# Altium PCB MRv2.PcbDoc
Units mm, origin at the board's own origin, x right, y up, seen from the top; angles counter-clockwise.
Board outline 58.67 x 73.25 mm, 2 copper layers (Top Layer, Bottom Layer); 27 components, 29 nets, 132 pads, 15 vias.
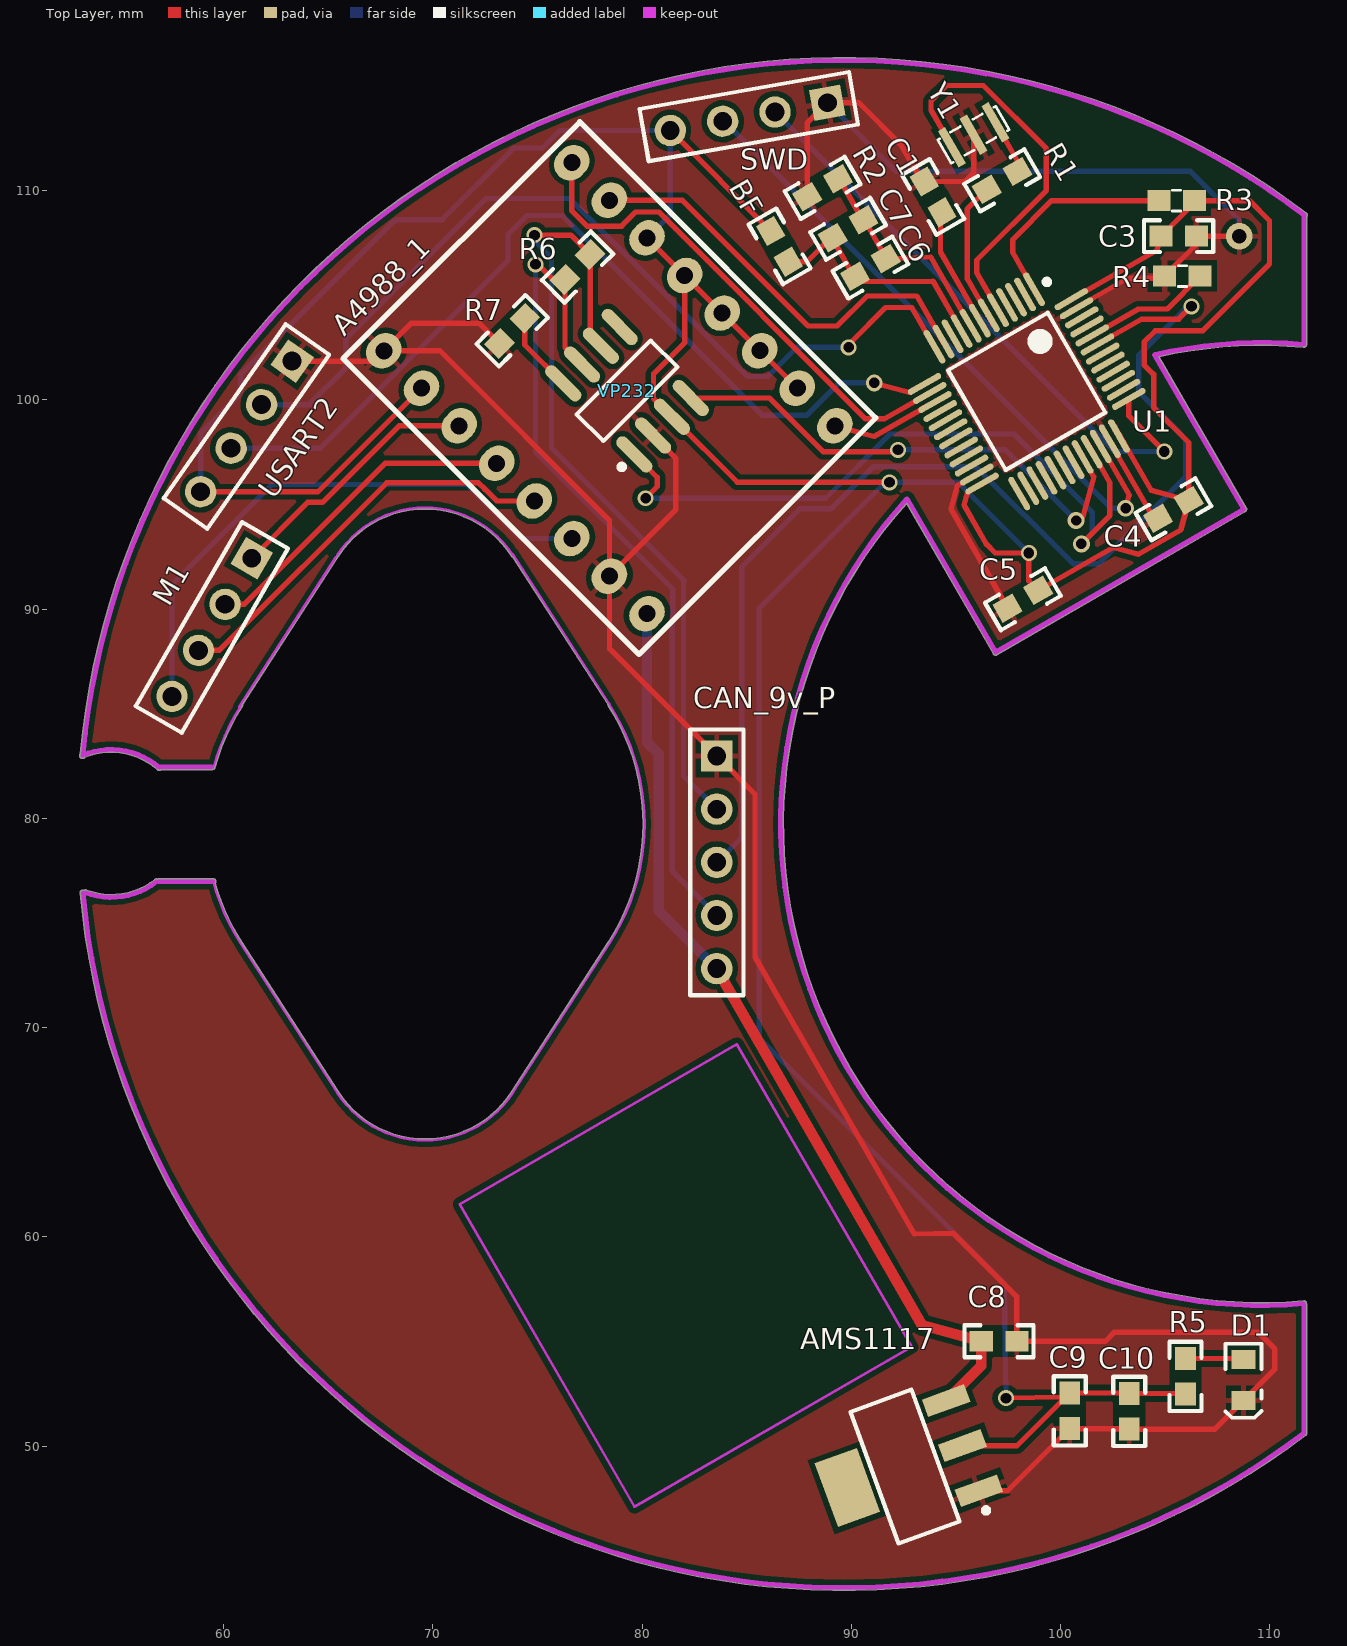
[diagram p0: Top Layer view]
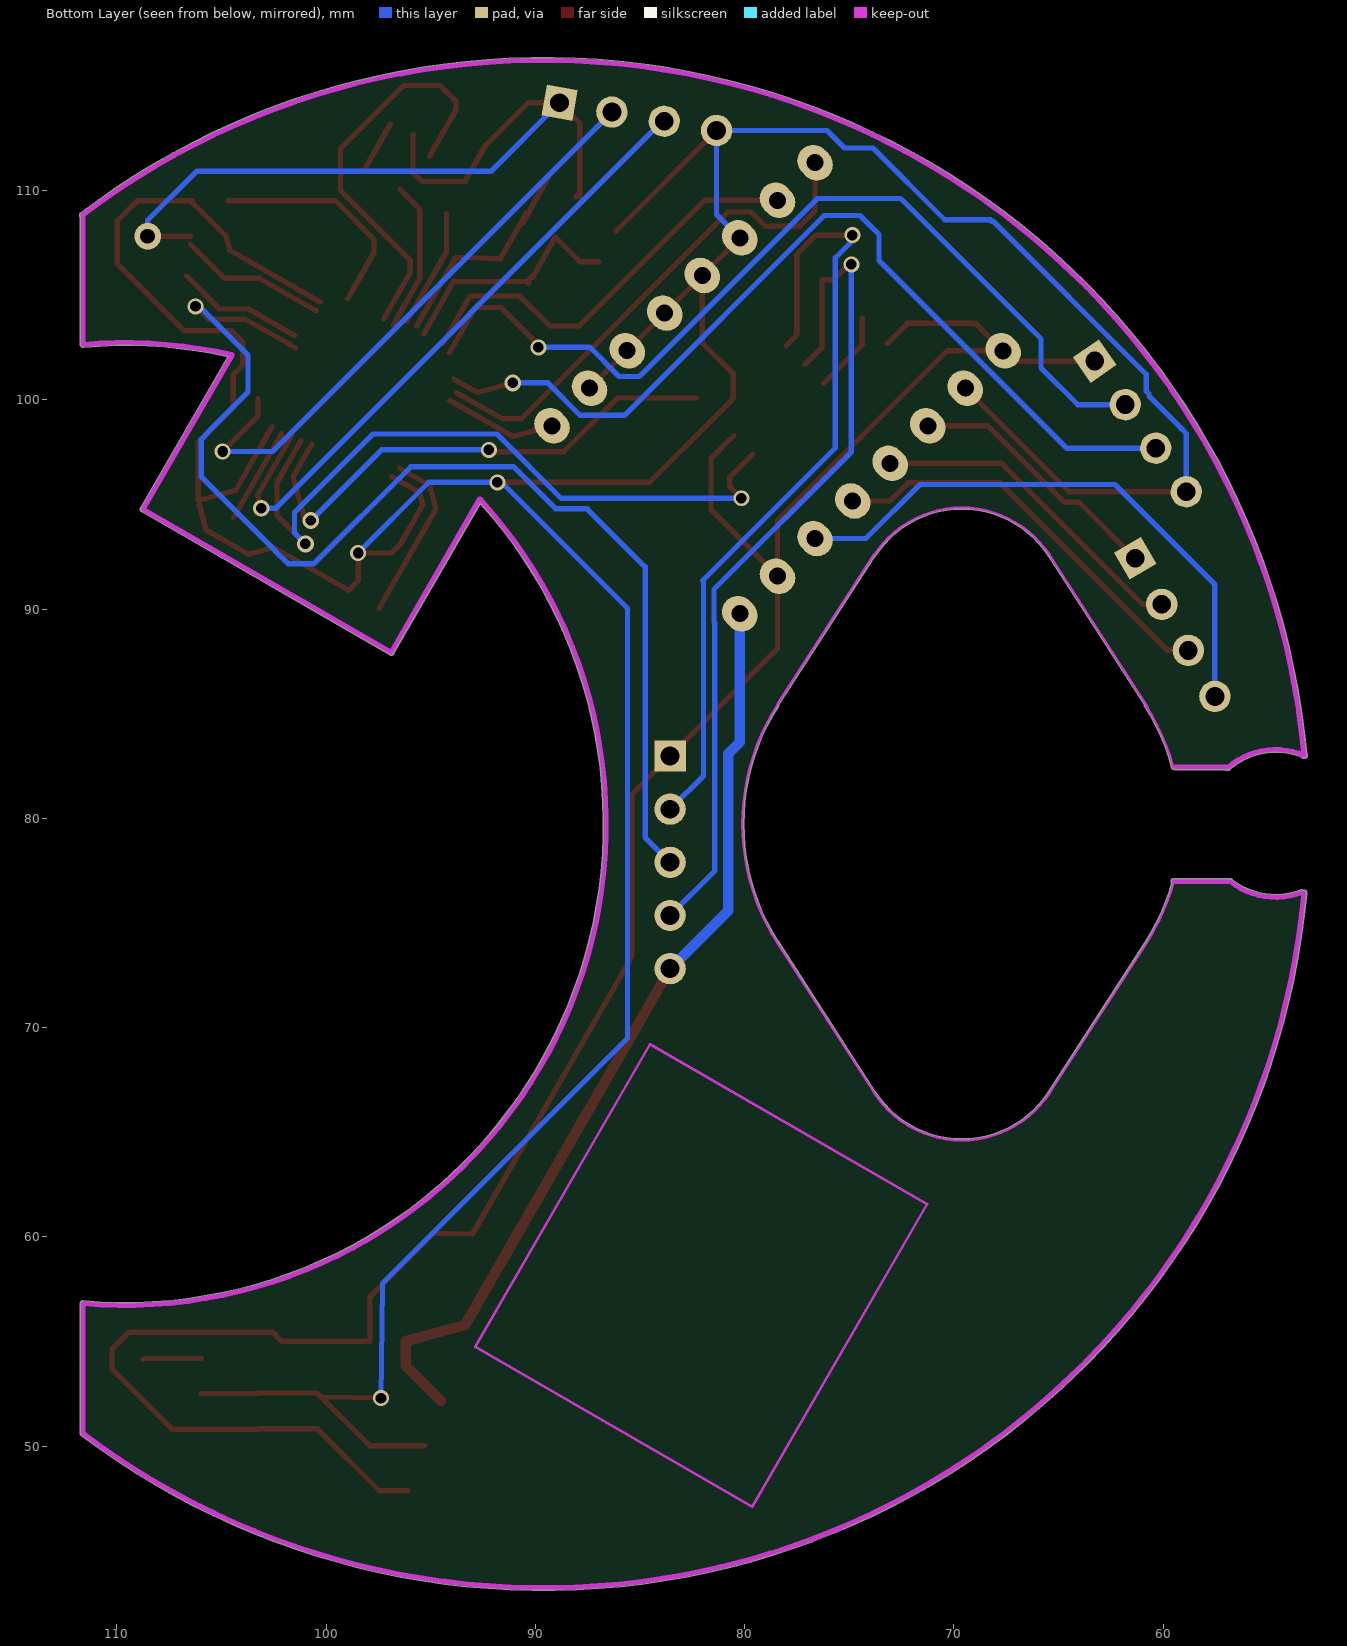
[diagram p1: Bottom Layer view, seen from below]

## Layer stack, top to bottom
Top Solder: solder mask 0.0102, Solder Resist, Dk 3.5
Top Layer: signal copper 0.0356
Dielectric1: dielectric 0.32, FR-4, Dk 4.8
Bottom Layer: signal copper 0.0356
Bottom Solder: solder mask 0.0102, Solder Resist, Dk 3.5

## Board outline
53.144,76.434 cw(c53.271,76.446) 53.322,76.563 cw(c53.392,76.457) 53.437,76.576 ccw(c54.623,79.733) 56.711,77.084 cw(c56.79,76.984) 56.853,77.095 cw(c56.921,76.987) 56.921,77.115 59.495,77.115 cw(c59.495,76.987) 59.623,76.987 cw(c59.495,76.987) 59.593,76.905 ccw(c69.623,79.733) 60.867,74.082 65.476,66.941 ccw(c65.422,66.906) 65.476,66.941 ccw(c69.623,69.618) 65.476,66.941 ccw(c69.623,69.618) 73.77,66.941 ccw(c69.623,69.618) 73.77,66.941 78.379,74.082 ccw(c69.623,79.733) 80.044,79.733 ccw(c69.623,79.733) 78.379,85.384 cw(c78.433,85.418) 78.371,85.435 cw(c78.419,85.478) 78.365,85.443 73.813,92.496 cw(c73.824,92.559) 73.77,92.525 ccw(c69.623,89.848) 65.476,92.525 cw(c65.422,92.559) 65.416,92.496 cw(c65.359,92.466) 65.423,92.466 cw(c65.359,92.466) 65.413,92.431 60.893,85.427 cw(c60.839,85.393) 60.903,85.393 cw(c60.839,85.393) 60.892,85.358 ccw(c69.648,79.707) 59.582,82.405 cw(c59.521,82.421) 59.502,82.36 cw(c59.411,82.448) 59.411,82.321 56.999,82.321 cw(c56.922,82.423) 56.839,82.327 ccw(c54.623,79.784) 53.364,82.913 cw(c53.269,82.998) 53.245,82.873 cw(c53.243,83) 53.149,83.087 cw(c89.623,79.733) 111.733,108.934 cw(c111.656,108.832) 111.784,108.832 cw(c111.656,108.832) 111.75,108.746 111.75,102.647 cw(c111.623,102.647) 111.617,102.52 cw(c111.61,102.647) 111.599,102.52 ccw(c109.623,79.733) 104.694,102.068 108.803,94.95 cw(c108.693,94.886) 108.82,94.886 cw(c108.693,94.886) 108.82,94.886 cw(c108.757,94.776) 108.884,94.776 cw(c108.757,94.776) 108.82,94.665 96.96,87.818 ccw(c96.897,87.928) 96.96,87.818 96.955,87.815 cw(c96.892,87.925) 96.768,87.896 92.638,95.051 ccw(c109.623,79.733) 111.607,56.947 cw(c111.618,56.82) 111.746,56.82 cw(c111.618,56.82) 111.745,56.806 cw(c111.623,56.769) 111.75,56.769 111.75,50.654 cw(c111.63,50.613) 111.757,50.613 cw(c111.63,50.613) 111.707,50.512 cw(c89.623,79.733)

## Design rules (kind name [scope] priority, off if disabled: settings)
Clearance [All] p1: gap=0.254
PolygonConnect [All] p1: connectstyle=Relief reliefconductorwidth=0.254 reliefentries=4 polygonreliefangle="90 Angle" airgapwidth=0.254
RoutingVias [All] p1: holewidth=0.711 width=1.27 viastyle="Through Hole" minholewidth=0.711 minwidth=1.27 maxholewidth=0.711 maxwidth=1.27
SolderMaskExpansion [All] p1: expansion=0.102
Width [All] p1: maxlimit=0.254 minlimit=0.254 preferedwidth=0.254
30 further rules are at their usual default settings.

## Components (designator, comment, footprint, x,y, rotation, side; value= is the part's Value field where it differs from the comment)
A4988_1 "stepstrick_driver" A4988 78.435,100.559 r45 top
AMS1117 "ASM1117" SOT223 92.558,49.022 r200 top
BF "BF" R1608[0603] 86.563,107.34 r120 top
C1 "cap smd" C1608[0603]N 93.904,109.703 r300 top
C3 "cap smd" C1608[0603]N 105.639,107.823 r0 top
C4 "cap smd" C1608[0603]N 105.385,94.767 r210 top
C5 "cap smd" C1608[0603]N 98.196,90.475 r210 top
C6 "cap smd" C1608[0603]N 90.907,106.324 r30 top
C7 "cap smd" C1608[0603]N 89.84,108.179 r30 top
C8 "cap smd" C1608[0603]N 97.053,55.016 r0 top
C9 "cap smd" C1608[0603]N 100.432,51.689 r270 top
C10 "cap smd" C1608[0603]N 103.276,51.664 r270 top
CAN_9v_P "H_P" HDR1X5 83.566,82.982 r270 top
D1 "LED" D1608[0603] 108.737,53.162 r270 top
M1 "Motor1" HDR1X4 61.341,92.431 r240 top
R1 "RES1" R1608[0603] 97.206,110.49 r210 top
R2 "RES1" R1608[0603] 88.621,110.134 r210 top
R3 "RES1" 1608[0603] 105.537,109.525 r180 top
R4 "RES1" 1608[0603] 105.816,105.918 r0 top
R5 "RES1" R1608[0603] 105.969,53.34 r270 top
R6 "RES1" R1608[0603] 76.911,106.35 r225 top
R7 "RES1" R1608[0603] 73.787,103.302 r225 top
SWD "Header 4" HDR1X4 88.849,114.198 r190 top
U1 "STM32F103C8T6" LQFP48_N 98.374,100.406 r300 top
USART2 "Header 4" HDR1X4 63.271,101.854 r235 top
VP232 "VP230" VP232 79.273,100.432 r135 top
Y1 "CRYSTAL_8M" Crystal_C 95.834,112.674 r30 top

## Footprints (in the part's own frame and the unit in brackets; to place one, negate y for a bottom-side part, rotate by r counter-clockwise, add the part's x,y. Pads: shape width x height; smd on the part's side, far side on the other; paste and mask are expansions set on the pad)
1608[0603] [mm] "Chip Capacitor; Body 1.6 x 0.8 mm (LxW typ)"
  rect 1.1x1 smd: 1(-0.85,0) 2(0.85,0)
  silkscreen extent -0.2,-0.5 0.2,0.5
A4988 [mil]
  oval 70x60 hole 32: 1(-250.39,350) 2(-250,250) 3(-250,150) 4(-250,50) 5(-250,-50) 6(-250,-150) 7(-250,-250) 8(-250,-350) 9(250,350) 10(250,250) 11(250,150) 12(250,50) 13(250,-50) 14(250,-150) 15(250,-250) 16(250,-350)
  silkscreen extent -315,-394 315,394
C1608[0603]N [mm] "Chip Capacitor; Body 1.6 x 0.8 mm (LxW typ)"
  rect 1.1x1 smd: 1(-0.85,0) 2(0.85,0)
  silkscreen extent -1.65,-0.76 1.65,0.76, body extent -0.8,-0.4 0.8,0.4, height 0.8
Crystal_C [mm] "含电容晶振，村田 3.2X1.3mm"
  rect 0.4x2 smd: 1(-1.2,0) 2(0,0) 3(1.2,0)
  silkscreen extent -1.6,-0.65 1.6,0.65
D1608[0603] [mm]
  rect 0.9x1.15 smd: 1(-0.98,0) 2(0.98,0)
  silkscreen extent -1.73,-0.86 1.8,0.86, body extent -0.8,-0.4 0.8,0.4, height 0.8
HDR1X4 [mm] "Connector; Header; 4 Position"
  rect 1.5x1.5 hole 0.9: 1(0,0)
  round 1.5 hole 0.9: 2(2.54,0) 3(5.08,0) 4(7.62,0)
  silkscreen extent -1.27,-1.27 8.89,1.27
HDR1X5 [mm] "Connector; Header; 5 Position"
  rect 1.5x1.5 hole 0.9: 1(0,0)
  round 1.5 hole 0.9: 2(2.54,0) 3(5.08,0) 4(7.62,0) 5(10.16,0)
  silkscreen extent -1.27,-1.27 11.43,1.27
LQFP48_N [mm] "Thin QFP, 48-Leads, Body 7x7mm, Pitch 0.5mm, IPC Medium Density"
  oval 1.8x0.3 smd: 1(-4.05,2.75) 2(-4.05,2.25) 3(-4.05,1.75) 4(-4.05,1.25) 5(-4.05,0.75) 6(-4.05,0.25) 7(-4.05,-0.25) 8(-4.05,-0.75) 9(-4.05,-1.25) 10(-4.05,-1.75) 11(-4.05,-2.25) 12(-4.05,-2.75) 25(4.05,-2.75) 26(4.05,-2.25) 27(4.05,-1.75) 28(4.05,-1.25) 29(4.05,-0.75) 30(4.05,-0.25) 31(4.05,0.25) 32(4.05,0.75) 33(4.05,1.25) 34(4.05,1.75) 35(4.05,2.25) 36(4.05,2.75)
  oval 0.3x1.8 smd: 13(-2.75,-4.05) 14(-2.25,-4.05) 15(-1.75,-4.05) 16(-1.25,-4.05) 17(-0.75,-4.05) 18(-0.25,-4.05) 19(0.25,-4.05) 20(0.75,-4.05) 21(1.25,-4.05) 22(1.75,-4.05) 23(2.25,-4.05) 24(2.75,-4.05) 37(2.75,4.05) 38(2.25,4.05) 39(1.75,4.05) 40(1.25,4.05) 41(0.75,4.05) 42(0.25,4.05) 43(-0.25,4.05) 44(-0.75,4.05) 45(-1.25,4.05) 46(-1.75,4.05) 47(-2.25,4.05) 48(-2.75,4.05)
  silkscreen extent -4.17,-2.75 2.75,3.57, body extent -3.5,-3.5 3.5,3.5, height 1.6
R1608[0603] [mm] "Chip Capacitor; Body 1.6 x 0.8 mm (LxW typ)"
  rect 1.1x1 smd: 1(-0.85,0) 2(0.85,0)
  silkscreen extent -1.65,-0.76 1.65,0.76, body extent -0.8,-0.4 0.8,0.4, height 0.5
SOT223 [mm] "SOT223, 4-Leads, Body 6.50x7.00mm (avg), Pitch 2.29mm, IPC Medium Density"
  rect 2.15x0.9 smd: 1(-2.925,2.29) 2(-2.925,0) 3(-2.925,-2.29)
  rect 2.15x3.25 smd: 4(2.925,0)
  silkscreen extent -3.05,-3.35 1.55,3.41, body extent -1.85,-3.35 1.85,3.35, height 1.8
VP232 [mm]
  oval 2.2x0.6 smd: 1(-2.394,1.898) 2(-2.394,0.628) 3(-2.394,-0.642) 4(-2.394,-1.912) 5(2.406,-1.912) 6(2.406,-0.642) 7(2.406,0.628) 8(2.406,1.898)
  silkscreen extent -2.52,-2.51 0.91,2.87, body extent -1.99,-2.51 2.01,2.49, height 1.75

## Part data
BF: "磁珠"
C1 C3 C4 C5 C6 C7 C8 C9 C10: library part CAP, "贴片无极性电容"
CAN_9v_P: library part "Header 5", "Header, 5-Pin"
D1: "蓝色 LED"
M1: library part "Header 4", "Header, 4-Pin"
SWD USART2: "Header, 4-Pin"
U1: "STM32 ARM-based 32-bit MCU Performance Line with 64 kB Flash, 20 kB Internal RAM, -40 to +85癈 Temperature, 48-Pin LQFP, Tray"
VP232: library part Component_1
Y1: library part CRYSTAL_C, "Crystal_8M"

## Via types
v1: diameter 0.762, hole 0.508, Top Layer to Bottom Layer, 10 vias
v2: diameter 0.8, hole 0.5, Top Layer to Bottom Layer, 4 vias
v3: diameter 1.27, hole 0.711, Top Layer to Bottom Layer, 1 vias

## Nets (pads, with @x,y where several pads share a name; then routed paths per layer and width w, separated by ;. In a path a pad name is that pad's centre, name@x,y a point inside that pad or via, vN(x,y) a via of type N, cw(c..) or ccw(c..) an arc to the next point about the centre after c; other vN are vias at no path point)
AGND: C6.2 C7.2 R2.1 U1.8 | length 11
  Top Layer w0.254: R2.1@89.383,110.623 C7.2@90.646,108.411 ; C7.2@90.424,108.946 90.609,108.623 91.67,106.765 C6.2@91.679,106.749 ; C6.2 C6.2@91.679,106.749 ; U1.8@95.675,103.535 93.793,106.828 C6.2@91.679,106.749
BOOT0: R4.2 U1.44 | length 6.1
  Top Layer w0.254: U1.44 103.718,104.344 105.093,104.344 ; 105.098,104.35 R4.2
CANH: CAN_9v_P.4 R6.2 VP232.7 | length 40.9
  Top Layer w0.254: v1@74.917,106.566 75.734,105.749 R6.2 76.31,102.507 VP232.7
  Bottom Layer w0.254: v1(74.905,106.477) 74.905,97.511 81.464,90.951 81.464,89.399 81.432,89.367 81.432,77.495 CAN_9v_P.4
CANL: CAN_9v_P.2 R6.1 VP232.6 | length 38.6
  Top Layer w0.254: v1(74.854,107.874) 76.589,107.874 R6.1 77.512,103.101 VP232.6
  Bottom Layer w0.254: v1(74.854,107.874) 74.854,107.605 75.667,106.792 75.667,97.714 82.007,91.373 ; 81.972,91.338 81.972,82.036 CAN_9v_P.2
CANRX: U1.32 VP232.4 | length 25
  Top Layer w0.254: VP232.4 86.087,100.091 88.648,97.53 v1@92.183,97.53 ; U1.32@100.693,97.883 101.043,97.271 101.584,96.325 101.066,94.426 v2(100.734,94.236)
  Bottom Layer w0.254: v1(92.227,97.612) 97.358,97.612 v2(100.734,94.236)
CANTX: U1.33 VP232.1 | length 34.5
  Top Layer w0.254: VP232.1 80.721,96.3 80.721,95.86 v1(80.162,95.301) v1@80.137,95.301 ; v2(100.99,93.116) 102.348,94.474 102.348,96.054 101.502,97.535 U1.33@101.201,98.061
  Bottom Layer w0.254: v1(80.162,95.301) 88.773,95.301 91.846,98.374 97.765,98.374 101.515,94.624 101.515,93.641 v2(100.99,93.116)
ER: CAN_9v_P.3 U1.43 | length 57
  Top Layer w0.254: U1.43@101.481,102.497 101.754,102.652 103.868,103.861 105.639,103.861 v1(106.248,104.47)
  Bottom Layer w0.254: CAN_9v_P.3 84.76,79.096 84.76,92.024 87.528,94.793 89.027,94.793 91.034,96.799 95.961,96.799 100.584,92.177 101.829,92.177 102.438,92.786 ; 102.475,92.823 105.969,96.317 105.969,98.117 105.673,98.412 105.673,98.441 103.734,100.381 103.734,102.142 106.061,104.47 v1(106.248,104.47)
GND: A4988_1.1 A4988_1.7 AMS1117.1 C1.1 C3.2 C4.2 C5.2 C8.2 C9.2 C10.2 CAN_9v_P.1 D1.2 R2.2 R4.1 R7.2 SWD.1 U1.23 U1.35 U1.47 USART2.1 VP232.2 Y1.2 | length 171.9
  Top Layer w0.254: USART2.1 67.158,101.854 A4988_1.1 ; R7.2 72.229,103.657 68.962,103.657 A4988_1.1 ; VP232.2 81.61,97.207 81.61,94.753 A4988_1.7 ; R2.2 87.884,113.234 SWD.1 90.358,114.198 92.39,112.166 C1.1@93.389,110.418 ; R2.2@88.012,109.782 R2.2@88.055,109.707 ; C1.1 95.42,110.439 95.849,110.868 95.849,112.659 Y1.2 ; AMS1117.1 97.463,47.871 C9.2 103.251,50.839 C10.2 107.369,50.814 D1.2 110.236,53.681 110.236,54.635 109.423,55.448 102.565,55.448 102.133,55.016 C8.2 97.903,57.138 94.869,60.173 93.009,60.14 85.395,73.381 85.395,81.153 CAN_9v_P.1 78.435,88.113 A4988_1.7 ; U1.23@96.491,96.741 95.068,95.928 94.755,94.783 C5.2 ; U1.47@100.465,104.249 100.741,104.407 103.205,105.815 104.863,105.815 R4.1 C3.2@106.489,107.44 ; U1.35@102.132,98.384 C4.2@104.422,94.377 ; C3.2 v3(108.534,107.823) ; A4988_1.1 70.333,102.348 78.435,94.245 A4988_1.7
  Bottom Layer w0.254: SWD.1 92.126,110.922 106.197,110.922 108.534,108.585 v3(108.534,107.823)
MOTOR1_1A: A4988_1.4 M1.2 | length 15.8
  Top Layer w0.254: M1.2 60.979,90.231 67.715,96.966 A4988_1.4
MOTOR1_1B: A4988_1.3 M1.1 | length 12.5
  Top Layer w0.254: M1.1 64.014,95.104 64.719,95.104 68.377,98.763 A4988_1.3
MOTOR1_2A: A4988_1.5 M1.3 | length 19.7
  Top Layer w0.254: M1.3 59.786,88.031 67.793,96.037 72.18,96.037 72.484,95.734 72.491,95.734 73.054,95.17 A4988_1.5
MOTOR1_2B: A4988_1.6 M1.4 | length 27.5
  Bottom Layer w0.254: M1.4 57.531,91.186 62.306,95.961 71.628,95.961 74.215,93.374 A4988_1.6
MOTOR1_DIR: A4988_1.9 U1.14 | length 24.5
  Top Layer w0.254: A4988_1.9 76.639,109.035 77.368,108.306 79.02,108.306 79.689,108.976 80.794,108.976 90.677,99.093 91.575,99.093 U1.14 U1.14@93.787,100.357
MOTOR1_ENB: A4988_1.16 U1.15 | length 5.4
  Top Layer w0.254: A4988_1.16 91.078,98.254 U1.15@94.091,99.976
MOTOR1_STEP: A4988_1.10 U1.11 | length 20.4
  Top Layer w0.254: A4988_1.10 81.919,109.539 87.928,103.53 89.317,103.53 90.755,104.968 93.107,104.968 93.142,104.933 94.376,102.774 U1.11@94.405,102.722
NetD1_1: D1.1 R5.1 | length 2.8
  Top Layer w0.254: R5.1 108.69,54.19 D1.1
NetR1_1: R1.1 Y1.3 | length 2.5
  Top Layer w0.254: Y1.3@96.926,113.188 R1.1@98.19,110.977
NetR3_2: R3.2 U1.1 | length 10.9
  Top Layer w0.254: U1.1@98.976,104.834 98.72,105.282 97.713,107.045 97.713,107.669 99.568,109.525 R3.2
NetR7_1: R7.1 VP232.8 | length 3.9
  Top Layer w0.254: R7.1 74.388,102.633 VP232.8
NRST: C1.2 U1.7 | length 5.6
  Top Layer w0.254: C1.2@94.254,108.892 94.254,107.076 U1.7
OSC_IN: U1.5 Y1.1 | length 19.9
  Top Layer w0.254: Y1.1@95.065,111.641 94.812,112.084 93.801,113.853 93.801,114.273 94.555,115.027 96.299,115.027 99.314,112.012 99.314,110.007 95.987,106.68 95.987,106.076 ; 95.999,106.054 97.006,104.293 U1.5@97.25,103.865
OSC_OUT: R1.2 U1.6 | length 7.2
  Top Layer w0.254: R1.2 95.529,109.125 95.529,105.797 96.542,104.025 U1.6@96.793,103.585
SWCLK: SWD.2 U1.37 | length 28.5
  Top Layer w0.254: U1.37 103.257,99.232 v1(104.953,97.536)
  Bottom Layer w0.254: SWD.2 102.569,97.536 v1(104.953,97.536)
SWDIO: SWD.3 U1.34 | length 30.9
  Top Layer w0.254: U1.34@101.633,98.315 101.936,97.786 103.271,95.449 v2(103.099,94.818)
  Bottom Layer w0.254: SWD.3@83.872,113.367 102.421,94.818 v2(103.099,94.818)
USART2_RX: U1.13 USART2.3 | length 43.7
  Top Layer w0.254: v2(91.084,100.813) 92.77,100.353 U1.13@93.888,100.992
  Bottom Layer w0.254: USART2.3 64.622,97.693 73.584,106.655 73.584,107.899 74.498,108.814 76.2,108.814 85.75,99.263 87.859,99.263 89.408,100.813 v2(91.084,100.813)
USART2_TX: U1.12 USART2.2 | length 43.2
  Top Layer w0.254: v1@89.967,102.743 91.637,104.413 92.884,104.413 93.958,102.533 U1.12@94.126,102.239
  Bottom Layer w0.254: USART2.2 64.086,99.773 65.837,101.524 65.837,102.921 72.542,109.626 76.53,109.626 85.035,101.122 86.003,101.122 87.396,102.514 v1(89.865,102.514)
V9.0: A4988_1.8 AMS1117.3 C8.1 CAN_9v_P.5 | length 44.8
  Top Layer w0.254: A4988_1.8@80.231,89.466 A4988_1.8
  Top Layer w0.5: CAN_9v_P.5 93.358,55.792 C8.1 96.203,53.855 AMS1117.3
  Bottom Layer w0.5: A4988_1.8 80.231,83.65 80.797,83.083 80.797,75.59 CAN_9v_P.5
VDD: A4988_1.2 A4988_1.11 A4988_1.12 A4988_1.13 A4988_1.14 A4988_1.15 AMS1117.2 BF.2 C3.1 C4.1 C5.1 C9.1 C10.1 R3.1 R5.2 SWD.4 U1.24 U1.36 U1.48 USART2.4 VP232.3 | length 213.3
  Top Layer w0.254: USART2.4 64.508,95.612 A4988_1.2 ; A4988_1.11 A4988_1.12 ; SWD.4 81.345,112.87 BF.2 ; A4988_1.15 A4988_1.13 A4988_1.12 ; v1(91.821,96.063) 84.55,96.063 VP232.3 80.543,100.07 80.543,101.244 82.027,102.728 A4988_1.12 ; AMS1117.2 97.915,50.022 C9.1 ; U1.24@96.867,96.335 96.251,95.983 95.548,95.581 95.382,94.974 96.448,93.108 96.872,92.685 v1(98.476,92.685) 98.476,91.357 C5.1 102.524,92.952 103.716,92.627 105.74,93.784 C4.1@106.07,94.996 ; v1(97.384,52.299) 100.14,52.349 100.191,52.299 C9.1 ; U1.48@100.287,104.681 104.604,107.148 C3.1 106.387,109.421 R3.1 109.017,109.525 109.982,108.56 109.982,106.502 106.782,103.302 104.521,103.302 103.988,102.768 103.988,101.675 104.444,101.219 104.444,99.642 106.121,97.965 C4.1 104.322,95.683 102.826,98.3 U1.36@102.589,98.714 ; R5.2 105.945,52.514 C10.1 103.251,52.539 C9.1
  Bottom Layer w0.254: USART2.4 58.901,98.394 59.156,98.649 59.156,98.653 60.684,100.181 60.684,100.292 60.812,100.421 60.812,101.223 68.133,108.544 68.205,108.544 68.272,108.61 70.442,108.61 73.871,112.039 75.235,112.039 76.071,112.875 SWD.4 81.345,108.857 A4988_1.11 ; 97.307,57.633 v1(97.384,52.299) ; 97.307,57.785 85.598,69.494 85.598,90.043 91.618,96.063 v1(91.821,96.063) 95.098,96.063 v1(98.476,92.685)
VDDA: BF.1 C6.1 C7.1 U1.9 | length 11.5
  Top Layer w0.254: BF.1 87.879,106.604 89.052,107.778 89.076,107.738 C6.1@90.137,105.88 ; C6.1 90.409,105.66 93.854,105.66 ; C6.1@90.308,105.581 C6.1@90.316,105.567 ; 93.898,105.686 U1.9@95.345,103.154
pads on no net: AMS1117.4 U1.2 U1.3 U1.4 U1.10 U1.16 U1.17 U1.18 U1.19 U1.20 U1.21 U1.22 U1.25 U1.26 U1.27 U1.28 U1.29 U1.30 U1.31 U1.38 U1.39 U1.40 U1.41 U1.42 U1.45 U1.46 VP232.5
copper on no net: | length 0.2
  Bottom Layer w0.254: 97.307,57.633 97.307,57.785

## Polygon pours and split planes (outlines as drawn)
GND on Top Layer "Top Overlay-No Net" (solid, remove dead copper, pour order 6): 49.225,120.625 49.936,120.98 124.308,120.625 124.308,34.544 124.054,34.29 48.031,34.29 48.031,120.625 49.581,120.625 50.292,120.625

## Keep-outs
Keep-Out Layer:
  lines w0.127: 59.495,77.019 ccw(c69.623,79.733) 60.813,74.047 65.422,66.906 ccw(c69.623,69.618) 73.824,66.906 78.433,74.047 ccw(c69.623,79.733) 78.433,85.418 ; 59.521,82.421 cw(c69.648,79.707) 60.839,85.393 ; 60.751,85.325 65.359,92.466 ; 65.422,92.559 cw(c69.623,89.848) 73.824,92.559 ; 73.81,92.618 78.419,85.478 ; 71.286,61.561 84.525,69.204 92.874,54.743 79.635,47.1 71.286,61.561
  lines w0.254: 53.243,83 cw(c54.623,79.784) 56.922,82.423 ; 53.269,82.998 cw(c89.623,79.733) 111.656,108.832 ; 53.271,76.446 ccw(c89.623,79.733) 111.63,50.613 ; 53.392,76.457 ccw(c54.623,79.733) 56.79,76.984 ; 56.921,76.987 59.495,76.987 ; 56.921,82.448 59.411,82.448 ; 92.655,95.26 ccw(c109.623,79.733) 111.618,56.82 ; 92.674,95.243 96.897,87.928 ; 96.892,87.925 108.757,94.776 ; 104.5,102.15 108.693,94.886 ; 104.515,102.159 cw(c109.623,79.733) 111.61,102.647 ; 111.623,50.622 111.623,56.769 ; 111.623,102.647 111.623,108.788

## Silkscreen, mask and mechanical layers (free items; w line width, h text height)
Mechanical 1:
  lines w0.127: 92.521,94.354 96.628,87.241 109.618,94.741 105.512,101.854 cw(c109.623,79.733) 112.623,102.032 ; 92.521,94.354 ccw(c109.623,79.733) 112.623,57.434 ; 112.623,57.434 112.623,50.114 cw(c89.623,79.733) 52.162,78.017 ccw(c54.623,79.733) 52.162,81.449 cw(c89.623,79.733) 112.623,109.351 112.623,102.032